# EAGLE board Atrix_breakout (EAGLE 7.2.0)
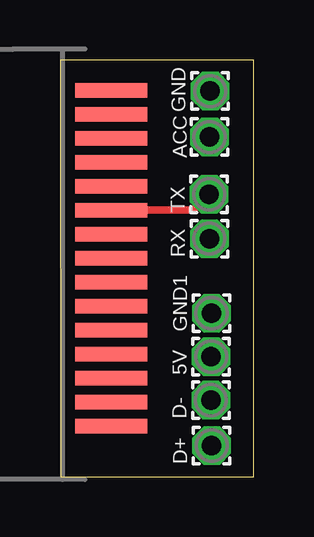
[diagram p0: board, top side]
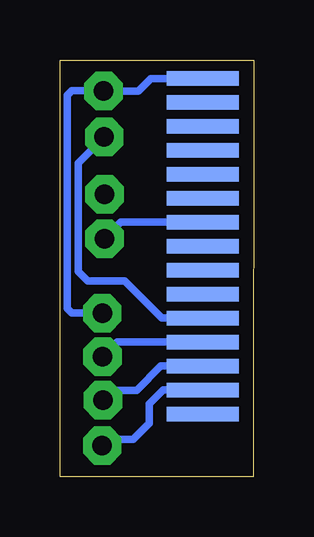
[diagram p1: board, bottom side, seen from below]

Size 8.07 x 17.39 mm. Coordinates in mm from the lower left corner, seen from the top.
Outline: 0.03,0 8.07,0 8.07,17.39 0,17.39 0.03,0
Copper layers (1*16): Top 0.035mm / dielectric 1.5mm / Bottom 0.035mm
Design rules "default": minimum track width 10mil, minimum drill 24mil, track to track 8mil, track to pad 8mil, pad to pad 8mil, via to via 8mil, smd to smd 8mil, copper to edge 40mil, drill to drill 8mil, minimum pad ring 10mil, minimum via ring 8mil, stop-mask expansion 4mil, vias tented up to drill 0mil, thermal gap 10mil

## Footprints (pad centres in the part's own frame; a part is rotated, then mirrored left to right if it is on the bottom)
1,6/0,8 = drill 0.813 pad 1.6 octagon: 1 0,0
IPOD_MALE_CONNECTOR = smd 0.6 x 3 bottom: 1 7.5,0; 3 6.5,0; 5 5.5,0; 7 4.5,0; 9 3.5,0; 11 2.5,0; 13 1.5,0; 15 0.5,0; 17 -0.5,0; 19 -1.5,0; 21 -2.5,0; 23 -3.5,0; 25 -4.5,0; 27 -5.5,0; 29 -6.5,0 | smd 0.6 x 3: 2 7,0; 4 6,0; 6 5,0; 8 4,0; 10 3,0; 12 2,0; 14 1,0; 16 0,0; 18 -1,0; 20 -2,0; 22 -3,0; 24 -4,0; 26 -5,0; 28 -6,0; 30 -7,0

## Placement (x,y rotation side)
5V  [1,6/0,8]  6.3,5.02 90 top
ACC  [1,6/0,8]  6.23,14.18 90 top
D+  [1,6/0,8]  6.32,1.31 90 top
D-  [1,6/0,8]  6.29,3.21 90 top
GND  [1,6/0,8]  6.25,16.1 90 top
GND1  [1,6/0,8]  6.31,6.83 90 top
RX  [1,6/0,8]  6.22,9.94 90 top
TX  [1,6/0,8]  6.22,11.79 90 top
U$1  IPOD_CONNECTOR_MALE  [IPOD_MALE_CONNECTOR]  2.13,9.13 90 top

## Library data of the parts
5V ACC D+ D- GND GND1 RX TX = wirepad
U$1 = SparkFun-Connectors

## Nets
GND: GND1.1 GND.1 U$1.1
N$2: ACC.1 U$1.21
N$3: D-.1 U$1.25
N$4: D+.1 U$1.27
N$6: RX.1 U$1.13
N$7: TX.1 U$1.12
N$8: 5V.1 U$1.23

## Tracks (layer width: path | path; a pad name or v marks a point on that pad's centre or on a via)
GND
  Bottom 0.305: GND1.1 7.58,6.83 7.77,7.02 7.77,15.92 7.58,16.12 6.27,16.12 GND.1 4.82,16.1 4.3,16.62 U$1.1
N$2
  Bottom 0.305: U$1.21 3.83,6.62 5.38,8.17 6.91,8.17 7.32,8.58 7.32,13.1 ACC.1
N$3
  Bottom 0.305: U$1.25 3.87,4.62 4.88,3.62 5.87,3.62 D-.1
N$4
  Bottom 0.305: U$1.27 3.77,3.62 4.35,3.05 4.35,2.23 5.02,1.56 6.06,1.56 D+.1
N$6
  Bottom 0.305: U$1.13 5.54,10.62 RX.1
N$7
  Top 0.305: U$1.12 5.55,11.12 TX.1
N$8
  Bottom 0.305: U$1.23 5.69,5.62 5V.1